# Altium PCB penny.PcbDoc
Units mm, origin at the board's own origin, x right, y up, seen from the top; angles counter-clockwise.
Board outline 50 x 30 mm, 2 copper layers (Top Layer, Bottom Layer); 46 components, 37 nets, 121 pads, 16 vias.
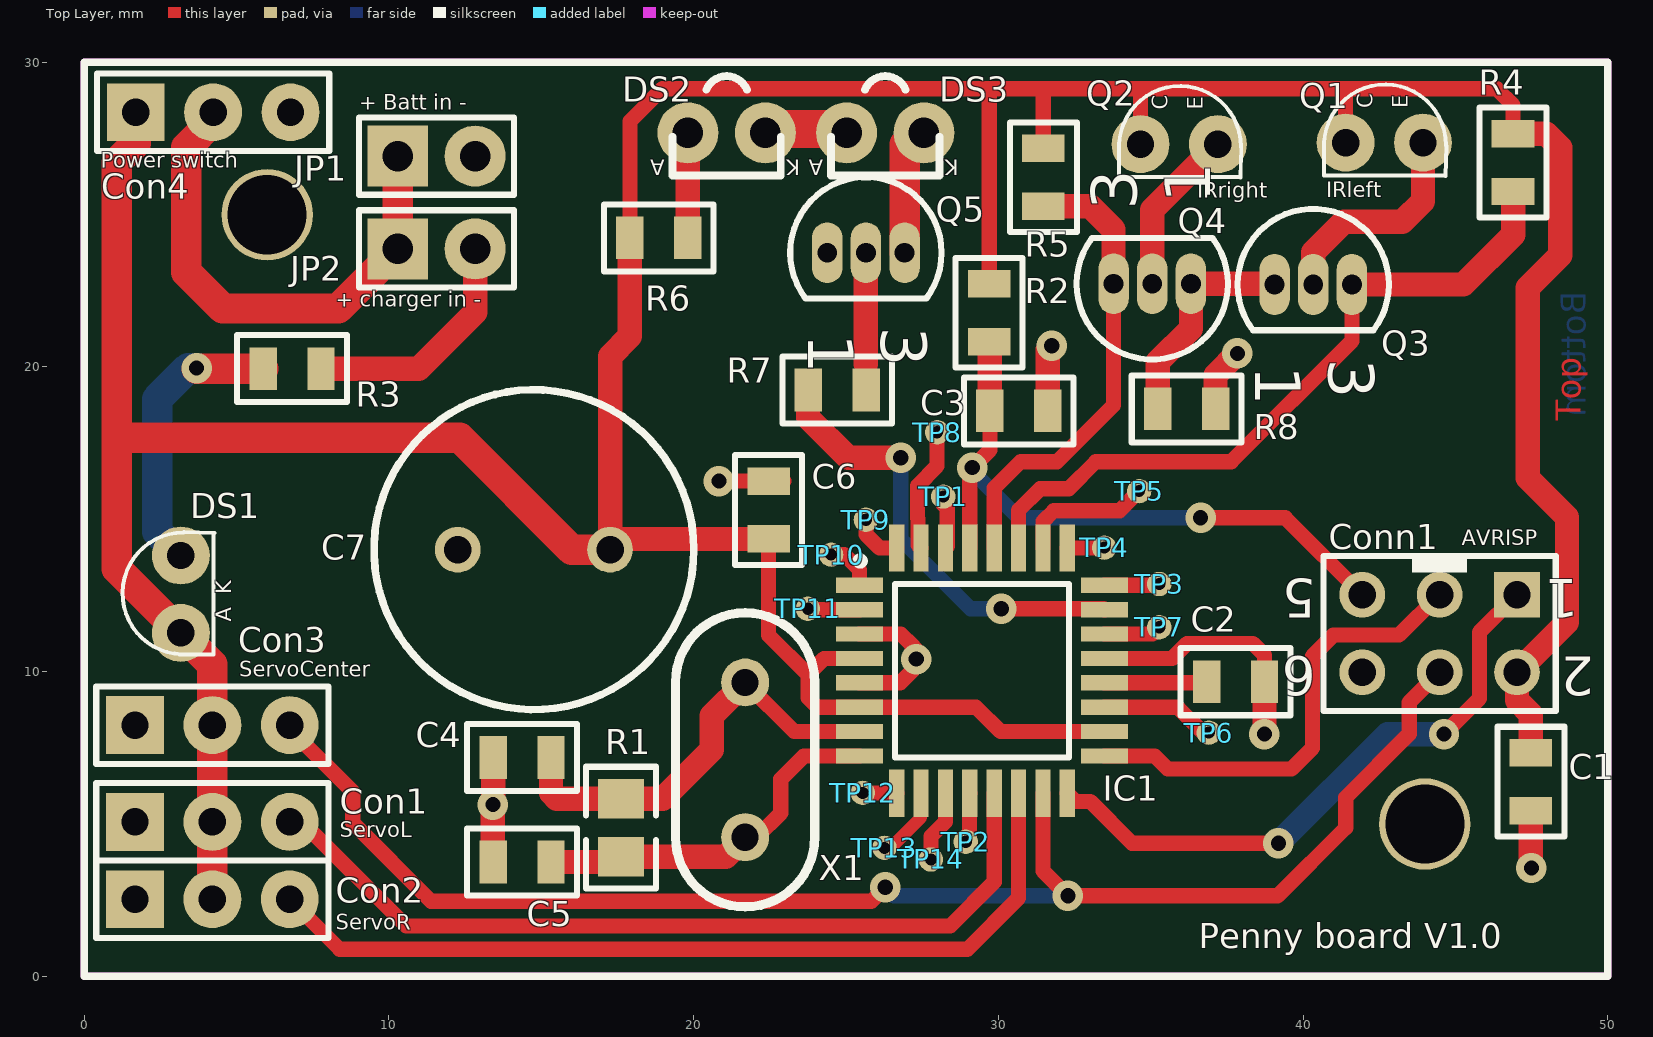
[diagram p0: Top Layer view]
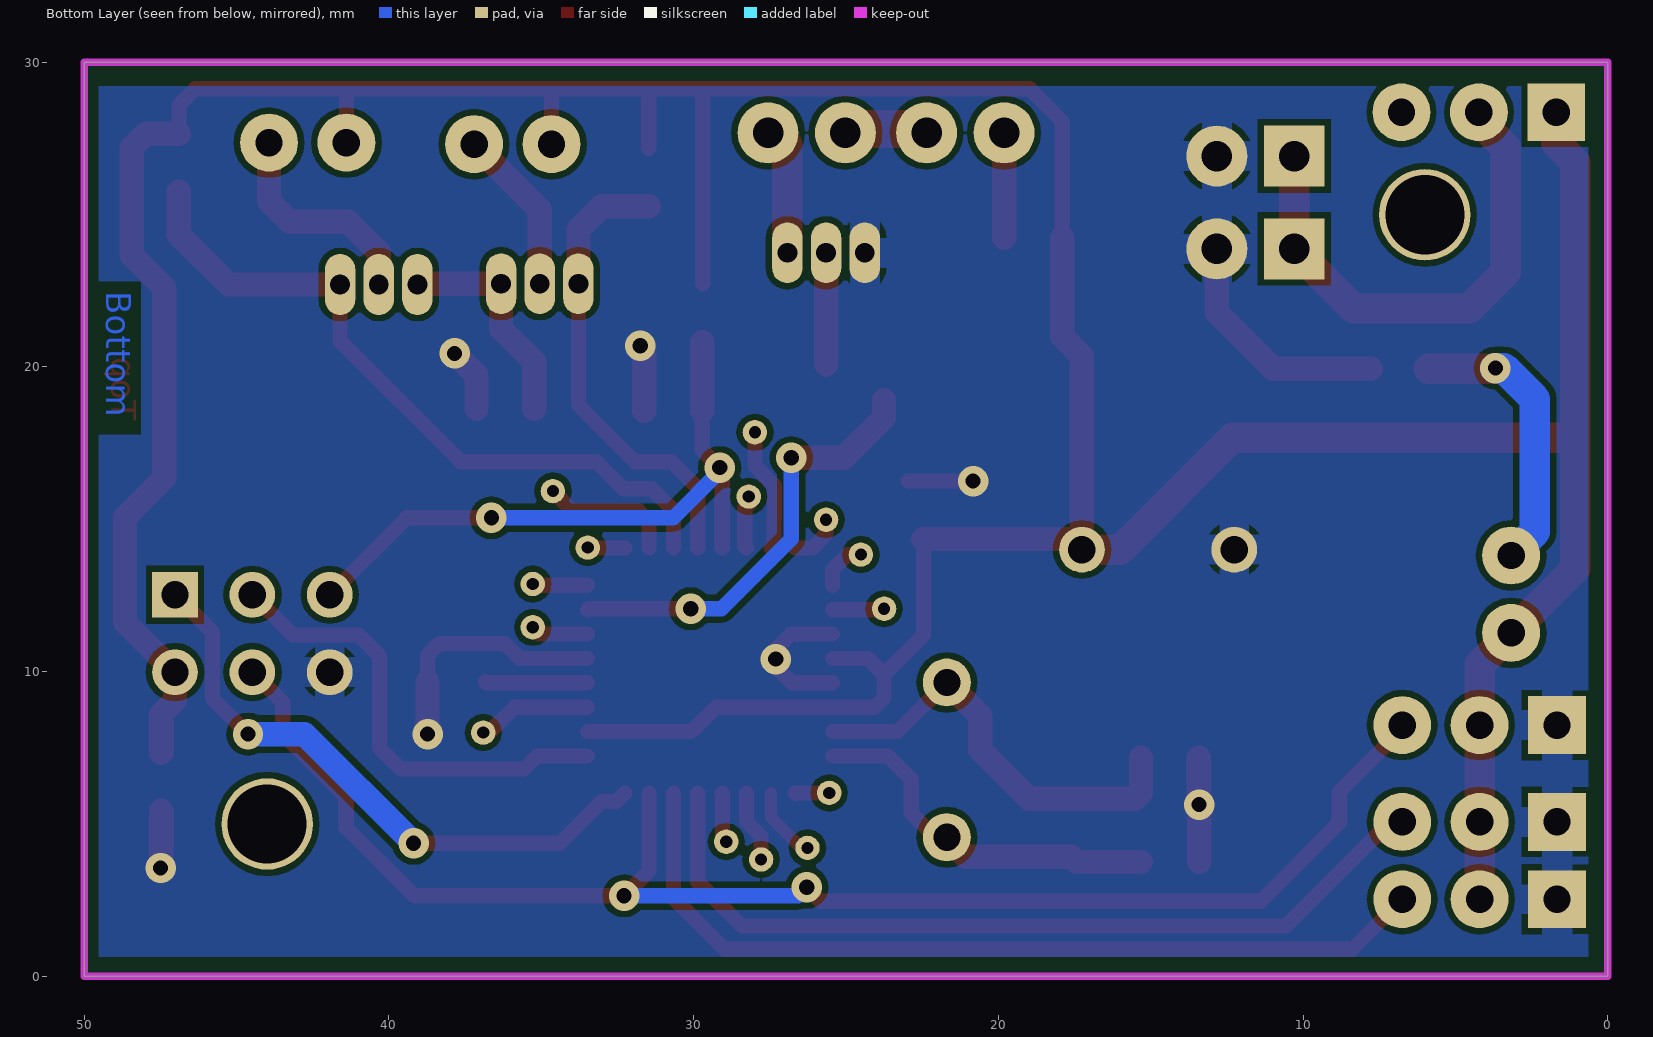
[diagram p1: Bottom Layer view, seen from below]

## Layer stack, top to bottom
Top Layer: signal copper 0.0356
Dielectric: dielectric 0.32, FR-4, Dk 4.8
Bottom Layer: signal copper 0.0356

## Board outline
0,0 0,30 50,30 50,0

## Design rules (kind name [scope] priority, off if disabled: settings)
Clearance [All] p1: gap=0.2
ComponentClearance [All] p1: gap=0 collisioncheckmode=3 verticalgap=0 showdistances=FALSE
HoleSize [All] p1: absolutevalues=TRUE maxlimit=6 minlimit=0.06 maxpercent=80.000 minpercent=20.000
MinimumAnnularRing [All] p1: minimumring=0.16
MinimumSolderMaskSliver [All] p1 off: minsoldermaskwidth=0.254
PolygonConnect [All] p1: connectstyle=Relief reliefconductorwidth=1 reliefentries=4 polygonreliefangle="90 Angle"
RoomDefinition penny [InComponentClass('penny')] p1: confinementstyle=ConfineIn formatcopy=TRUE lockcomponents=FALSE outline -24.003,-10.414 68.453,-10.414 68.453,48.895 -24.003,48.895
RoutingVias [All] p1: holewidth=0.5 width=1 viastyle="Through Hole" minholewidth=0.3 minwidth=0.6 maxholewidth=9 maxwidth=10
SilkToSilkClearance [All] p1 off: silktosilkclearance=0.254
SilkscreenOverComponentPads [IsPad] p1 off: minsilkscreentomaskgap=0.254
SolderMaskExpansion [All] p1: expansion=0.102
Width [All] p1: maxlimit=10 minlimit=0.16 preferedwidth=0.2 minimp=50.000000 maximp=50.000000 favimp=50.000000
23 further rules are at their usual default settings.

## Components (designator, comment, footprint, x,y, rotation, side; value= is the part's Value field where it differs from the comment)
C1 "CAP" 0805 47.498,5.436 r90 top
C2 "CAP 100nF" 0805 36.83,9.652 r0 top
C3 "CAP 100nF" 0805 29.718,18.542 r0 top
C4 "CAP18pF" 0805 13.411,7.163 r0 top
C5 "CAP18pF" 0805 13.411,3.734 r0 top
C6 "CAP 100nF" 0805 22.479,14.351 r90 top
C7 "FOOTPRINT NIET OK" RB5-10.5 14.757,13.995 r180 top
Con1 "Header 3" HDR1X3 1.651,5.08 r0 top
Con2 "Header 3" HDR1X3 1.651,2.54 r0 top
Con3 "Header 3" HDR1X3 1.651,8.255 r0 top
Con4 "Header 3" HDR1X3 1.676,28.372 r0 top
Conn1 "Header 6" HDR2X3 47.015,12.522 r180 top
DS1 "LED1" LED-1 3.175,12.548 r180 top
DS2 "IR led" GL480IRLED 19.812,30.226 r180 top
DS3 "IR led" GL480IRLED 25.019,30.226 r180 top
IC1 "ATmega8A-AU" 32A 29.464,10.033 r0 top
JP1 "Header 2" HDR1X2 10.287,26.924 r0 top
JP2 "Header 2" HDR1X2 10.287,23.876 r0 top
Q1 "BPW96" BPW96 42.672,27.356 r90 top
Q2 "BPW96" BPW96 35.941,27.305 r90 top
Q3 "2N3904" BCY-W3/E4 40.335,22.708 r270 top
Q4 "2N3904" BCY-W3/E4 35.052,22.733 r90 top
Q5 "2N3904" BCY-W3/E4 25.654,23.749 r270 top
R1 "Res 0805" CR2012-0805 17.602,4.877 r90 top
R2 "Res 0805 10k" 0805 29.718,20.828 r90 top
R3 "Res 0805 3k3" 0805 7.772,19.964 r180 top
R4 "Res 0805 10k" 0805 46.914,25.756 r90 top
R5 "RES 10K" 0805 31.496,25.273 r90 top
R6 "Res 0805 47R" 0805 19.812,24.257 r180 top
R7 "Res 0805 1k" 0805 23.754,19.228 r0 top
R8 "" 0805 37.135,18.644 r180 top
TP1 "CE" EXPERIMENTPAD 28.194,15.748 r90 top
TP2 "CE" experimentpad 28.931,4.42 r90 top
TP3 "CE" experimentpad 35.281,12.878 r90 top
TP4 "CE" experimentpad 33.477,14.072 r90 top
TP5 "CE" experimentpad 34.62,15.926 r90 top
TP6 "CE" experimentpad 36.906,8.001 r90 top
TP7 "CE" experimentpad 35.281,11.455 r90 top
TP8 "CE" experimentpad 27.991,17.856 r90 top
TP9 "CE" experimentpad 25.654,14.986 r90 top
TP10 "CE" experimentpad 24.511,13.843 r90 top
TP11 "CE" experimentpad 23.749,12.065 r90 top
TP12 "CE" experimentpad 25.552,6.02 r90 top
TP13 "CE" experimentpad 26.264,4.216 r90 top
TP14 "CE" experimentpad 27.788,3.835 r90 top
X1 "8MHz" HC49/U 21.692,4.547 r180 top

## Footprints (in the part's own frame and the unit in brackets; to place one, negate y for a bottom-side part, rotate by r counter-clockwise, add the part's x,y. Pads: shape width x height; smd on the part's side, far side on the other; paste and mask are expansions set on the pad)
32A [mm]
  rect 1.55x0.5 smd: 1(-4.025,2.8) 2(-4.025,2) 3(-4.025,1.2) 4(-4.025,0.4) 5(-4.025,-0.4) 6(-4.025,-1.2) 7(-4.025,-2) 8(-4.025,-2.8) 17(4.025,-2.8) 18(4.025,-2) 19(4.025,-1.2) 20(4.025,-0.4) 21(4.025,0.4) 22(4.025,1.2) 23(4.025,2) 24(4.025,2.8)
  rect 0.5x1.55 smd: 9(-2.8,-4.025) 10(-2,-4.025) 11(-1.2,-4.025) 12(-0.4,-4.025) 13(0.4,-4.025) 14(1.2,-4.025) 15(2,-4.025) 16(2.8,-4.025) 25(2.8,4.025) 26(2,4.025) 27(1.2,4.025) 28(0.4,4.025) 29(-0.4,4.025) 30(-1.2,4.025) 31(-2,4.025) 32(-2.8,4.025)
  silkscreen extent -4.12,-2.85 2.85,3.72
0805 [mm]
  rect 0.9x1.4 smd: 1(0.005,0.019) 2(1.905,0.019)
  silkscreen extent -0.84,-1.08 2.76,1.12
BCY-W3/E4 [mm]
  oval 2x1 hole 0.65: 1(0,-1.27) 2(0,0) 3(0,1.27)
  silkscreen extent -2.48,-2.48 1.5,2.48
BPW96 [mm]
  round 1.9 hole 0.9: 1(0.008,1.275) 3(0.008,-1.265)
  silkscreen extent -1.09,-2.03 1.92,1.98
CR2012-0805 [mm]
  rect 1.3x1.5 smd: 1(-0.947,-0.01) 2(0.954,-0.01)
  silkscreen extent -2,-1.16 2,1.14
EXPERIMENTPAD [mm]
  round 0.8 hole 0.4: 1(0,0)
experimentpad [mm]
  round 0.8 hole 0.4: 1(0,0)
GL480IRLED [mm]
  round 2 hole 1: 1(-2.54,2.54) 2(0,2.54)
  silkscreen extent -3.05,0.68 0.51,3.94
HC49/U [mil]
  round 62 hole 35: 1(0.06,-0.75) 2(0.06,-200.75)
  silkscreen extent -90,-291 90,89
HDR1X2 [mm]
  rect 2x2 hole 1: 1(0,0)
  round 2 hole 1: 2(2.54,0)
  silkscreen extent -1.27,-1.27 3.81,1.27
HDR1X3 [mm]
  rect 1.9x1.9 hole 0.9: 1(0.011,-0.01)
  round 1.9 hole 0.9: 2(2.551,-0.01) 3(5.091,-0.01)
  silkscreen extent -1.26,-1.28 6.36,1.26
HDR2X3 [mm]
  rect 1.5x1.5 hole 0.9: 1(-0.009,-0.001)
  round 1.5 hole 0.9: 2(-0.009,2.539) 3(2.531,-0.001) 4(2.531,2.539) 5(5.071,-0.001) 6(5.071,2.539)
  silkscreen extent -1.28,-1.27 6.34,3.81
LED-1 [mm]
  round 1.9 hole 0.9: 1(0.008,1.275) 2(0.008,-1.265)
  silkscreen extent -1.09,-2.03 1.92,1.98
RB5-10.5 [mm]
  round 1.5 hole 0.9: 1(-2.499,-0.01) 2(2.501,-0.01)
  silkscreen extent -5.25,-5.26 5.25,5.24

## Part data
C1 C2 C3 C4 C5 C6: "capacitor nonpolar"
C7: library part "Elco low ESR"
Con1 Con2 Con3 Con4: "Header, 3-Pin"
Conn1: "Header, 6-Pin"
DS1: "Typical RED GaAs LED"
DS2 DS3: "Typical INFRARED GaAs LED"
IC1: "8-Bit AVR Microcontroller with 8K Bytes of In-System Programmable Flash Memory"
JP1 JP2: "Header, 2-Pin"
Q1 Q2: library part "Photo NPN", "NPN Phototransistor"
Q3 Q4 Q5: "NPN General Purpose Amplifier"
R1: "Res 0805 137K"
R5: "0805 resistor"
R8: library part "Res 0805 47R", "Res 0805 470R"
TP1 TP2 TP3 TP4 TP5 TP6 TP7 TP8 TP9 TP10 TP11 TP12 TP13 TP14: library part TESTPOINT_1, "experimentpin"
X1: library part "CRYSTAL 8Mhz", "Crystal 8Mhz"

## Free pads (board coordinates)
  round 3 hole 2.6: 0(6,25) 0(44,5)

## Via types
v1: diameter 1, hole 0.5, Top Layer to Bottom Layer, tented both sides, 16 vias

## Nets (pads, with @x,y where several pads share a name; then routed paths per layer and width w, separated by ;. In a path a pad name is that pad's centre, name@x,y a point inside that pad or via, vN(x,y) a via of type N, cw(c..) or ccw(c..) an arc to the next point about the centre after c; other vN are vias at no path point)
"9 SERVO_L": Con1.3 IC1.13 | length 28.1
  Top Layer w0.5: Con1.3 7.147,5.07 10.566,1.651 28.423,1.651 29.864,3.092 IC1.13
"10 SERVO_R": Con2.3 IC1.14 | length 28.7
  Top Layer w0.5: Con2.3 8.384,0.889 28.981,0.889 30.664,2.572 IC1.14
"11 SERVO_CENTER": Con3.3 Conn1.4 IC1.15 | length 49
  Top Layer w0.5: Con3.3 6.742,8.117 8.814,6.045 8.814,5.029 11.379,2.464 25.832,2.464 v1(26.289,2.921) ; IC1.15 31.464,3.461 v1(32.283,2.642) 39.167,2.642 41.402,4.877 41.402,5.867 43.485,7.95 43.485,8.984 Conn1.4
  Bottom Layer w0.5: v1(26.289,2.921) 26.568,2.642 v1(32.283,2.642)
"A0 IRLEDPIN": IC1.23 R7.1 | length 14.5
  Top Layer w0.5: v1(30.099,12.065) 33.457,12.065 IC1.23
  Top Layer w0.8: R7.1@23.754,18.918 23.754,18.333 25.07,17.018 v1(26.797,17.018)
  Bottom Layer w0.5: v1(26.797,17.018) 26.797,14.351 29.083,12.065 v1(30.099,12.065)
"A4 IRLEFTSENSOR": IC1.27 Q3.3 R4.1 | length 23.7
  Top Layer w0.5: IC1.27 30.664,15.297 31.369,16.002 32.309,16.002 33.198,16.891 37.643,16.891 41.605,20.853 Q3.3
  Top Layer w0.8: Q3.3 45.263,22.708 46.895,24.34 R4.1
"A5 IRRIGHTSENSOR": IC1.28 Q4.3 R5.1 | length 15.4
  Top Layer w0.5: IC1.28 29.864,16.021 30.734,16.891 31.928,16.891 33.782,18.745 Q4.3
  Top Layer w0.8: R5.1 33.015,25.278 33.782,24.511 Q4.3
GND: C1.1 C2.2 C3.2 C4.1 C5.1 C6.2 C7.2 Con1.1 Con2.1 Con3.1 Conn1.6 IC1.3 IC1.5 IC1.21 JP1.2 JP2.2 Q5.1 R3.1 R8.1 | length 32.5
  Top Layer w0.5: C5.1@13.411,3.758 C5.1 ; v1(13.411,5.639) v1@13.417,5.644 ; 21.336,16.256 C6.2 C6.2@22.968,16.256 ; IC1.5 26.778,9.633 27.178,10.033 v1@27.178,10.852 ; IC1.3 26.797,11.233 v1@27.178,10.852 ; v1(27.305,10.414) 27.305,10.725 v1@27.178,10.852 ; IC1.21 35.706,10.433 36.195,10.922 38.354,10.922 38.735,10.541 C2.2 ; v1@47.479,3.575 v1(47.498,3.556)
  Top Layer w0.8: R3.1 10.979,19.945 12.827,21.793 JP2.2 ; C5.1@13.411,3.758 v1(13.411,5.639) ; v1@13.417,5.644 C4.1 ; C3.2 31.623,20.574 v1(31.75,20.701) ; R8.1 37.129,19.73 v1(37.846,20.447) v1@37.851,20.442 ; v1(38.735,7.95) C2.2 ; v1@47.479,3.575 C1.1
  other v1: 20.828,16.256
NetC2_1: C2.1 IC1.20 | length 3.4
  Top Layer w0.5: IC1.20 36.797,9.633 C2.1
NetC4_2: C4.2 IC1.7 R1.2 X1.2 | length 14.3
  Top Layer w0.5: X1.2 23.303,8.033 IC1.7
  Top Layer w0.8: C4.2 15.317,6.019 15.506,5.83 R1.2 18.988,5.83 20.599,7.442 20.599,8.555 X1.2
NetC5_2: C5.2 IC1.8 R1.1 X1.1 | length 12.2
  Top Layer w0.5: X1.1 22.066,4.566 22.86,5.359 22.86,6.477 23.616,7.233 IC1.8
  Top Layer w0.8: C5.2 17.434,3.753 R1.1 21.055,3.93 X1.1
NetCon4_2: Con4.2 JP1.1 JP2.1 | length 16.9
  Top Layer w1: Con4.2 4.228,28.081 3.353,27.206 3.353,23.114 4.547,21.92 8.331,21.92 JP2.1 JP1.1
NetConn1_1: Conn1.1 IC1.16 | length 20.1
  Top Layer w0.5: IC1.16 32.532,5.74 33.02,5.74 34.392,4.369 v1(39.192,4.369) ; v1(44.628,7.95) 45.796,9.119 45.796,11.295 Conn1.1
  Bottom Layer w0.8: v1(39.192,4.369) 42.774,7.95 v1(44.628,7.95)
NetConn1_3: Conn1.3 IC1.17 | length 15.3
  Top Layer w0.5: IC1.17 35.134,7.233 35.56,6.807 39.624,6.807 40.31,7.493 40.31,10.516 40.996,11.201 43.155,11.201 44.477,12.523 Conn1.3
NetDS1_2: DS1.2 R3.2 | length 9.4
  Top Layer w1: v1@3.683,19.939 3.689,19.945 R3.2
  Bottom Layer w1: DS1.2 2.388,14.592 2.388,18.948 3.404,19.964 v1(3.683,19.964)
NetDS2_1: DS2.1 DS3.2 | length 5.4
  Top Layer w1: DS2.1 24.765,27.686 25.019,27.94 DS2.1@22.352,27.94
NetDS2_2: DS2.2 R6.1 | length 3.5
  Top Layer w0.5: DS2.2@19.807,27.681 DS2.2
  Top Layer w0.8: R6.1 DS2.2@19.807,27.681
NetDS3_1: DS3.1 Q5.3 | length 4.5
  Top Layer w1: Q5.3 26.924,27.305 DS3.1@27.559,27.94
NetIC1_1: IC1.1 TP10.1 | length 1.6
  Top Layer w0.5: TP10.1 24.943,13.843 25.439,13.347 IC1.1
NetIC1_2: IC1.2 TP11.1 | length 1.7
  Top Layer w0.5: TP11.1 23.781,12.033 IC1.2
NetIC1_9: IC1.9 TP12.1 | length 1.1
  Top Layer w0.5: TP12.1 26.652,6.02 IC1.9
NetIC1_10: IC1.10 TP13.1 | length 2.4
  Top Layer w0.4: TP13.1 26.463,4.216 27.464,5.217 IC1.10
NetIC1_11: IC1.11 TP14.1 | length 2.4
  Top Layer w0.5: TP14.1 27.788,4.597 28.264,5.074 IC1.11
NetIC1_12: IC1.12 TP2.1 | length 1.6
  Top Layer w0.5: TP2.1 29.058,4.547 29.058,6.002 IC1.12
NetIC1_19: IC1.19 TP6.1 | length 3.8
  Top Layer w0.5: IC1.19 35.887,8.833 36.719,8.001 TP6.1
NetIC1_22: IC1.22 TP7.1 | length 1.9
  Top Layer w0.5: IC1.22 35.058,11.233 TP7.1
NetIC1_24: IC1.24 TP3.1 | length 1.8
  Top Layer w0.5: IC1.24 35.236,12.833 TP3.1
NetIC1_25: IC1.25 TP4.1 | length 1.2
  Top Layer w0.5: IC1.25 33.464,14.058 TP4.1
NetIC1_26: IC1.26 TP5.1 | length 4.4
  Top Layer w0.5: IC1.26 31.464,14.929 31.818,15.283 33.977,15.283 TP5.1
NetIC1_30: IC1.30 TP1.1 | length 1.8
  Top Layer w0.5: TP1.1 28.194,15.494 28.321,15.367 28.321,14.115 IC1.30
NetIC1_31: IC1.31 TP8.1 | length 4.1
  Top Layer w0.5: IC1.31 27.364,14.158 27.364,15.019 27.344,15.039 27.344,16.1 27.991,16.747 TP8.1
NetIC1_32: IC1.32 TP9.1 | length 1.7
  Top Layer w0.5: TP9.1 25.654,14.503 26.099,14.058 IC1.32
NetQ1_3: Q1.3 Q3.2 | length 7.3
  Top Layer w0.8: Q3.2 40.335,23.762 41.339,24.765 43.256,24.765 43.937,25.446 Q1.3
NetQ2_3: Q2.3 Q4.2 | length 5.5
  Top Layer w0.8: Q4.2 35.052,25.159 Q2.3
NetQ3_1: Q3.1 Q4.1 R8.2 | length 7.3
  Top Layer w0.8: R8.2 35.229,20.167 36.322,21.26 Q4.1 39.04,22.733 Q3.1
NetQ5_2: Q5.2 R7.2 | length 3.7
  Top Layer w0.8: 25.654,20.085 Q5.2
RESET: C3.1 Conn1.5 IC1.29 R2.1 | length 21.6
  Top Layer w0.5: IC1.29 29.064,16.613 29.723,17.272 C3.1 ; R2.1 R2.1@29.723,20.809 ; v1(36.639,15.05) 39.418,15.05 Conn1.5
  Top Layer w0.8: C3.1 R2.1@29.723,20.809
  Bottom Layer w0.5: v1@29.083,16.637 30.67,15.05 v1(36.639,15.05)
  other v1: 29.146,16.7
VCC: C1.2 C6.1 C7.1 Con1.2 Con2.2 Con3.2 Con4.1 Conn1.2 DS1.1 IC1.4 IC1.6 IC1.18 Q1.1 Q2.1 R2.2 R4.2 R5.2 R6.2 | length 149.2
  Top Layer w0.5: R6.2 17.907,25.958 ; 17.907,25.425 17.907,25.959 ; C6.1 22.46,11.195 23.749,9.906 ; IC1.4 24.276,10.433 23.749,9.906 ; R2.2 29.699,29.136 ; R5.2 31.477,29.136 ; IC1.18 30.067,8.033 29.267,8.833 IC1.6 24.06,8.833 23.749,9.144 23.749,9.906 ; Q2.1 34.666,29.136 ; Q1.1 41.397,29.131 ; R4.2 46.895,28.594 46.357,29.131 41.397,29.131 ; 17.907,25.959 17.907,28.067 18.976,29.136 29.699,29.136 ; 29.699,29.136 31.477,29.136 ; 31.477,29.136 34.666,29.136 ; 34.666,29.136 41.402,29.136 41.397,29.131
  Top Layer w0.8: R6.2 17.907,21.005 17.256,20.355 C7.1 17.607,14.356 C6.1 ; R4.2 47.98,27.661 48.438,27.203 48.438,23.673 47.371,22.606 47.371,16.358 48.666,15.062 48.666,11.625 Conn1.2 47.024,9.059 47.479,8.604 C1.2
  Top Layer w1: 1.143,17.674 12.324,17.674 15.992,14.005 C7.1 ; Con4.1@1.789,28.26 Con4.1 1.688,27.342 1.067,26.721 1.067,13.373 DS1.1 4.202,10.238 Con3.2 Con1.2 Con2.2
pads on no net: Con4.3

## Polygon pours and split planes (outlines as drawn)
GND on Bottom Layer "GND" (solid, remove dead copper, pour order 2): 0.635,29.21 0.635,0.635 49.53,0.635 49.53,29.21 0.635,29.21

## Keep-outs
Keep-Out Layer:
  the board outline again, w0.254

## Other copper
Top Layer:
  text "Top" at 49.124,18.237 h0.82 r90
Bottom Layer:
  text "Bottom" at 49.276,22.479 h0.82 r90

## Silkscreen, mask and mechanical layers (free items; w line width, h text height)
Top Overlay:
  the board outline again, w0.254
  text "+ Batt in -" at 9.017,28.448 h0.5
  text "Power switch" at 0.533,26.543 h0.5
  text "IRleft" at 40.767,25.578 h0.5
  text "IRright" at 36.525,25.552 h0.5
  text "+ charger in -" at 8.255,21.971 h0.5
  text "AVRISP" at 45.212,14.148 h0.5
  text "A  K" at 4.826,11.633 h0.5 r90
  text "ServoCenter" at 5.08,9.83 h0.5
  text "ServoL" at 8.382,4.572 h0.5
  text "ServoR" at 8.255,1.524 h0.5
  text "Penny board V1.0" at 36.576,0.914 h0.82

## Text inside footprints (layer, text, board x,y; h text height)
Conn1: Top Overlay "6" at 40.42,10.491 h1.27 r180; Top Overlay "5" at 40.42,13.031 h1.27 r180; Top Overlay "2" at 49.564,10.491 h1.27 r180; Top Overlay "1" at 49.056,13.031 h1.27 r180
DS2: Top Overlay "A" at 19.05,26.797 h0.5 r180; Top Overlay "K" at 23.495,26.797 h0.5 r180
DS3: Top Overlay "K" at 28.702,26.797 h0.5 r180; Top Overlay "A" at 24.257,26.797 h0.5 r180
Q1: Top Overlay "E" at 43.434,28.499 h0.5 r90; Top Overlay "C" at 42.291,28.499 h0.5 r90
Q2: Top Overlay "E" at 36.703,28.448 h0.5 r90; Top Overlay "C" at 35.56,28.448 h0.5 r90
Q3: Top Overlay "3" at 40.845,20.278 h1.5 r270; Top Overlay "1" at 38.435,20.048 h1.5 r270
Q4: Top Overlay "3" at 34.542,25.163 h1.5 r90; Top Overlay "1" at 36.952,25.393 h1.5 r90
Q5: Top Overlay "3" at 26.164,21.319 h1.5 r270; Top Overlay "1" at 23.754,21.089 h1.5 r270